# EAGLE board BoardSMU V2 PER STAMPA - Copia (EAGLE 9.6.2)
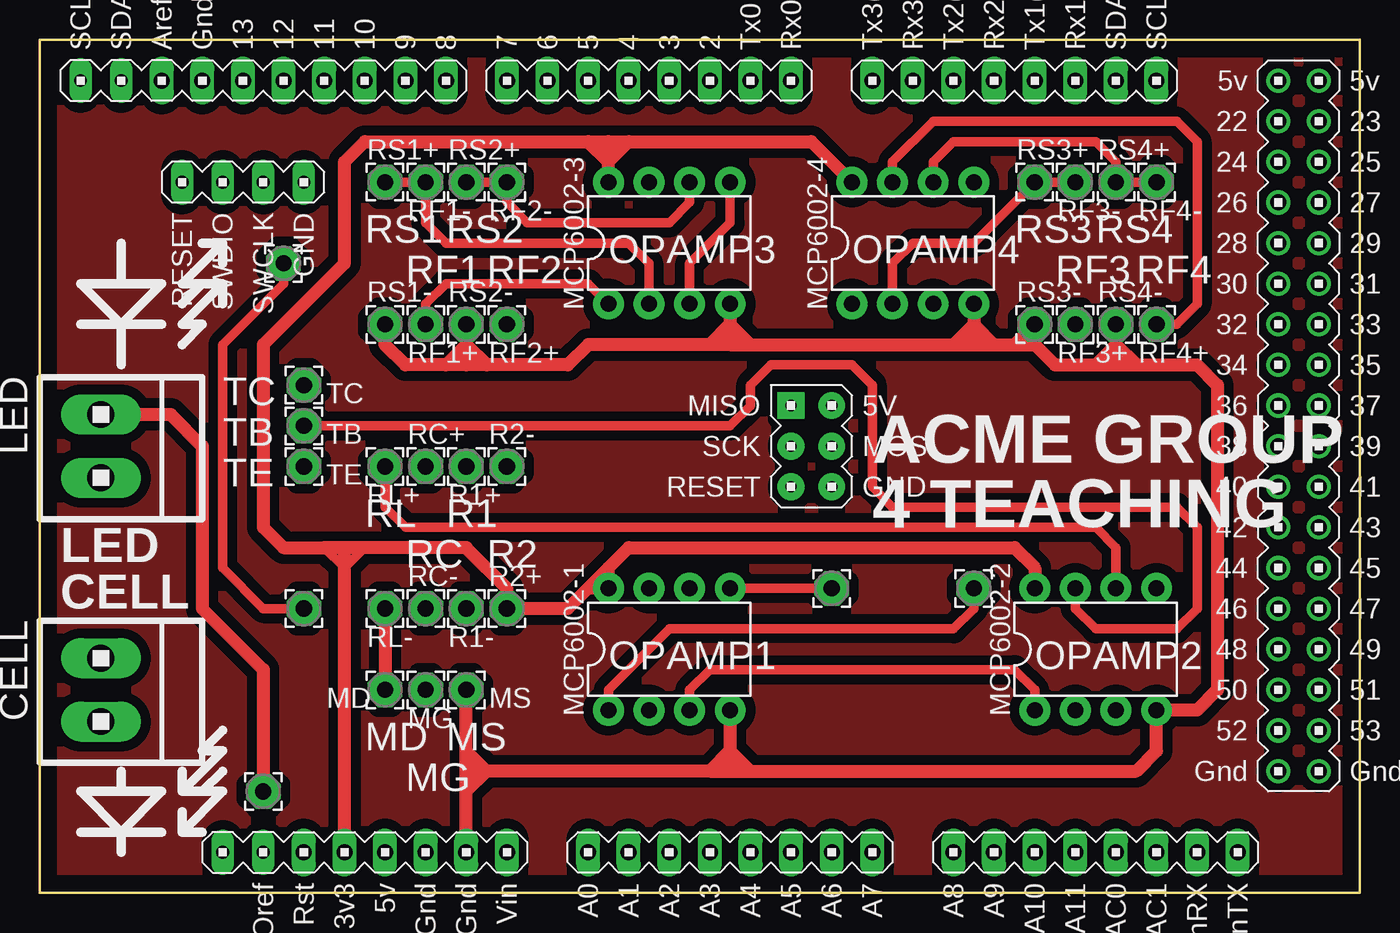
[diagram p0: board, top side]
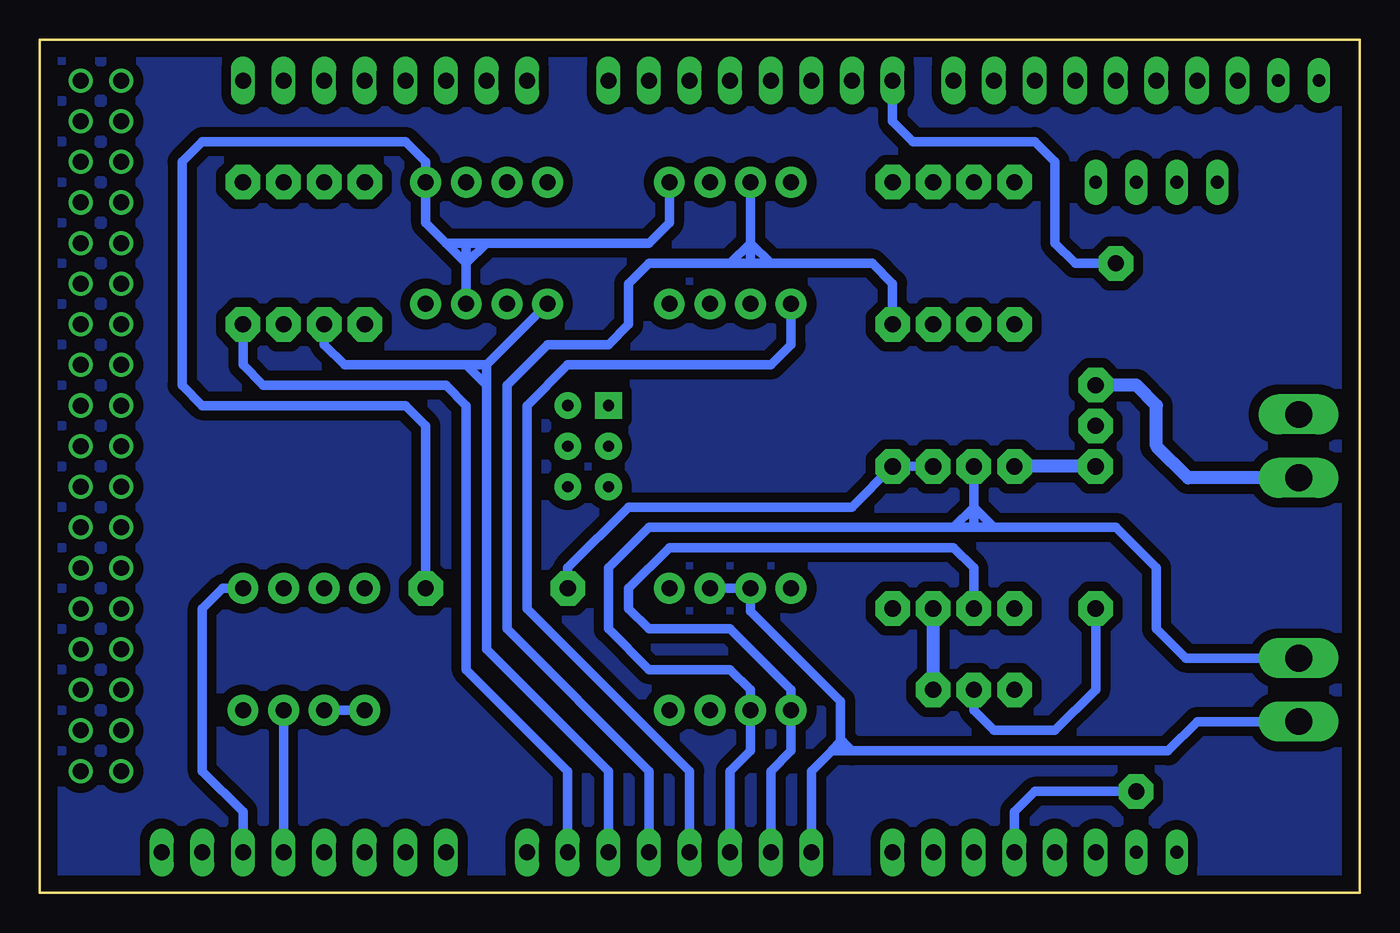
[diagram p1: board, bottom side, seen from below]

Size 82.55 x 53.34 mm. Coordinates in mm from the lower left corner, seen from the top.
Outline: 0,53.34 82.55,53.34 82.55,0 0,0 0,53.34
Copper layers (1*16): Top 0.035mm / dielectric 1.5mm / Bottom 0.035mm
Design rules "default": minimum track width 6mil, minimum drill 0.35mm, track to track 6mil, track to pad 6mil, pad to pad 6mil, via to via 6mil, smd to smd 6mil, copper to edge 40mil, drill to drill 6mil, minimum pad ring 10mil, minimum via ring 8mil, stop-mask expansion 4mil, vias tented up to drill 0mil, thermal gap 10mil

## Footprints (pad centres in the part's own frame; a part is rotated, then mirrored left to right if it is on the bottom)
1X2MTA = drill 1.676 long: 1 1.981,0; 2 -1.981,0
DUE(NORMAL) = drill 1 long: 2 -16.51,30.48; 3 -19.05,30.48; 3V3 -39.37,-17.78; 4 -21.59,30.48; 5 -24.13,30.48; 5V -36.83,-17.78; 6 -26.67,30.48; 7 -29.21,30.48; 8 -33.02,30.48; 9 -35.56,30.48; 10 -38.1,30.48; 11 -40.64,30.48; 12 -43.18,30.48; 13 -45.72,30.48; A0 -24.13,-17.78; A1 -21.59,-17.78; A2 -19.05,-17.78; A3 -16.51,-17.78; A4 -13.97,-17.78; A5 -11.43,-17.78; A6 -8.89,-17.78; A7 -6.35,-17.78; A8 -1.27,-17.78; A9 1.27,-17.78; A10 3.81,-17.78; A11 6.35,-17.78; AREF -50.8,30.48; AREF1 -50.8,30.48; CANRX 13.97,-17.78; CANTX 16.51,-17.78; DAC0 8.89,-17.78; DAC1 11.43,-17.78; GND1 -48.26,30.48; GND_1 -34.29,-17.78; GND_2 -31.75,-17.78; RESET -41.91,-17.78; RX0 -11.43,30.48; RX1 6.35,30.48; RX2 1.27,30.48; RX3 -3.81,30.48; SCL 11.43,30.48; SDA 8.89,30.48; TX0 -13.97,30.48; TX1 3.81,30.48; TX2 -1.27,30.48; TX3 -6.35,30.48; VIN -29.21,-17.78 | drill 1: 5V_A 19.05,30.48; 5V_B 21.59,30.48; 22 19.05,27.94; 23 21.59,27.94; 24 19.05,25.4; 25 21.59,25.4; 26 19.05,22.86; 27 21.59,22.86; 28 19.05,20.32; 29 21.59,20.32; 30 19.05,17.78; 31 21.59,17.78; 32 19.05,15.24; 33 21.59,15.24; 34 19.05,12.7; 35 21.59,12.7; 36 19.05,10.16; 37 21.59,10.16; 38 19.05,7.62; 39 21.59,7.62; 40 19.05,5.08; 41 21.59,5.08; 42 19.05,2.54; 43 21.59,2.54; 44 19.05,0; 45 21.59,0; 46 19.05,-2.54; 47 21.59,-2.54; 48 19.05,-5.08; 49 21.59,-5.08; 50 19.05,-7.62; 51 21.59,-7.62; 52 19.05,-10.16; 53 21.59,-10.16; GND_A 19.05,-12.7; GND_B 21.59,-12.7 | drill 0.7 pad 1.676: 5V_ICSP -8.89,5.08; GND_ICSP -8.89,10.16; MOSI_ICSP -8.89,7.62; RESET_ICSP -11.43,5.08; SCK_ICSP -11.43,7.62 | drill 0.8 pad 1.422 long: GND_DEBUG -41.91,24.13; IOREF -44.45,-17.78; NC -46.99,-17.78; RESET_DEBUG -49.53,24.13; SCL1 -55.88,30.48; SDA1 -53.34,30.48; SWCLK_DEBUG -44.45,24.13; SWDIO_DEBUG -46.99,24.13 | drill 0.7 pad 1.676 square: MISO_ICSP -11.43,10.16
DIL08 = drill 1 pad 1.93: 1 -3.81,-3.81; 2 -1.27,-3.81; 3 1.27,-3.81; 4 3.81,-3.81; 5 3.81,3.81; 6 1.27,3.81; 7 -1.27,3.81; 8 -3.81,3.81
2,15/1,0 = drill 1.016 pad 2.159 octagon: 1 0,0

## Placement (x,y rotation side)
CELL  [1X2MTA]  3.81,12.7 270 top
E$1  [DUE(NORMAL)]  58.42,20.32 0 top
LED  [1X2MTA]  3.81,27.94 270 top
MCP6002-1  [DIL08]  39.37,15.24 0 top
MCP6002-2  [DIL08]  66.04,15.24 0 top
MCP6002-3  [DIL08]  39.37,40.64 0 top
MCP6002-4  [DIL08]  54.61,40.64 0 top
MD  [2,15/1,0]  21.59,12.7 0 top
MG  [2,15/1,0]  24.13,12.7 0 top
MS  [2,15/1,0]  26.67,12.7 0 top
R1+  [2,15/1,0]  26.67,26.67 0 top
R1-  [2,15/1,0]  26.67,17.78 0 top
R2+  [2,15/1,0]  29.21,17.78 0 top
R2-  [2,15/1,0]  29.21,26.67 0 top
RC+  [2,15/1,0]  24.13,26.67 0 top
RC-  [2,15/1,0]  24.13,17.78 0 top
RF1+  [2,15/1,0]  24.13,35.56 0 top
RF1-  [2,15/1,0]  24.13,44.45 0 top
RF2+  [2,15/1,0]  29.21,35.56 0 top
RF2-  [2,15/1,0]  29.21,44.45 0 top
RF3+  [2,15/1,0]  64.77,35.56 0 top
RF3-  [2,15/1,0]  64.77,44.45 0 top
RF4+  [2,15/1,0]  69.85,35.56 0 top
RF4-  [2,15/1,0]  69.85,44.45 0 top
RL+  [2,15/1,0]  21.59,26.67 0 top
RL-  [2,15/1,0]  21.59,17.78 0 top
RS1+  [2,15/1,0]  21.59,44.45 0 top
RS1-  [2,15/1,0]  21.59,35.56 0 top
RS2+  [2,15/1,0]  26.67,44.45 0 top
RS2-  [2,15/1,0]  26.67,35.56 0 top
RS3+  [2,15/1,0]  62.23,44.45 0 top
RS3-  [2,15/1,0]  62.23,35.56 0 top
RS4+  [2,15/1,0]  67.31,44.45 0 top
RS4-  [2,15/1,0]  67.31,35.56 0 top
TB  [2,15/1,0]  16.51,29.21 0 top
TC  [2,15/1,0]  16.51,31.75 0 top
TE  [2,15/1,0]  16.51,26.67 0 top
V1  [2,15/1,0]  49.53,19.05 0 top  (not fitted)
V2  [2,15/1,0]  58.42,19.05 0 top  (not fitted)
V3  [2,15/1,0]  13.97,6.35 0 top  (not fitted)
V7  [2,15/1,0]  15.24,39.37 0 top  (not fitted)
V8  [2,15/1,0]  16.51,17.78 0 top  (not fitted)

## Library data of the parts
CELL LED = con-amp
E$1 = DUElib130425
MCP6002-1-MCP6002-4 = texas
MD MG MS R1+ R1- R2+ R2- RC+ RC- RF1+ RF1- RF2+ RF2- RF3+ RF3- RF4+ RF4- RL+ RL- RS1+ RS1- RS2+ RS2- RS3+ RS3- RS4+ RS4- TB TC TE V1-V3 V7 V8 = wirepad

## Nets
S$1: CELL.2 E$1.A2 MCP6002-1.2 RC+.1
S$2: E$1.A1 MCP6002-1.1 MCP6002-3.3 MCP6002-3.5 MCP6002-4.3 MCP6002-4.5 RC-.1 V2.1
S$3: E$1.DAC1 MCP6002-2.5
S$4: MCP6002-1.3 MCP6002-2.1 MCP6002-2.2
S$5: CELL.1 E$1.A0 MCP6002-1.6 MCP6002-1.7
S$6: MCP6002-2.7 TB.1
S$7: MCP6002-1.5 R1+.1 R2-.1 V1.1
S$8: E$1.A3 MCP6002-3.1 RF1+.1
S$9: LED.1 TC.1
S$10: E$1.GND_2 MCP6002-1.4 MCP6002-2.4 MCP6002-3.4 MCP6002-4.4 MS.1 R1-.1 RS1-.1 RS2-.1 RS3-.1 RS4-.1
S$11: MCP6002-2.6 RL+.1 TE.1
S$12: E$1.DAC0 MCP6002-2.3
S$13: MCP6002-3.2 RF1-.1 RS1+.1
S$14: MCP6002-3.6 RF2-.1 RS2+.1
S$15: MCP6002-4.2 RF3-.1 RS3+.1
S$16: MCP6002-4.6 RF4-.1 RS4+.1
S$17: E$1.5V LED.2 V3.1
S$18: E$1.3V3 MCP6002-1.8 MCP6002-2.8 MCP6002-3.8 MCP6002-4.8 R2+.1
S$19: E$1.A4 MCP6002-3.7 RF2+.1
S$20: E$1.A5 MCP6002-4.1 RF3+.1
S$21: E$1.A6 MCP6002-4.7 RF4+.1
S$24: MD.1 RL-.1
S$25: E$1.7 MG.1 V7.1 V8.1

## Tracks (layer width: path | path; a pad name or v marks a point on that pad's centre or on a via)
GNDBOTTOM
  pour Bottom (isolate 0.61): 0,53.34 82.55,53.34 82.55,0 0,0
GNDTOP
  pour Top (isolate 0.61): 0,53.34 82.55,53.34 82.55,0 0,0
S$1
  Bottom 0.61: E$1.A2 39.37,7.62 38.1,8.89 MCP6002-1.2 38.1,12.7 39.37,13.97 44.45,13.97 46.99,16.51 46.99,20.32 44.45,22.86 25.4,22.86 | CELL.2 10.87,14.68 12.7,16.51 12.7,20.32 15.24,22.86 22.86,22.86 | 25.4,22.86 24.13,22.86 | 24.13,22.86 22.86,22.86 | RC+.1 24.13,24.13 | 24.13,22.86 24.13,24.13 | 24.13,24.13 22.86,22.86 | 24.13,24.13 25.4,22.86
S$2
  Top 0.61: MCP6002-3.3 40.64,39.37 43.18,41.91 MCP6002-3.5 | V2.1 58.42,17.78 57.15,16.51 39.37,16.51 35.56,12.7 MCP6002-1.1
  Bottom 0.61: E$1.A1 36.83,7.62 35.56,8.89 MCP6002-1.1 35.56,12.7 39.37,16.51 44.45,16.51 45.72,17.78 45.72,19.05 43.18,21.59 25.4,21.59 24.13,20.32 RC-.1 | MCP6002-3.5 43.18,41.91 44.45,40.64 54.61,40.64 | 54.61,40.64 55.88,39.37 | MCP6002-4.3 55.88,39.37 | 55.88,39.37 57.15,40.64 | 57.15,40.64 58.42,41.91 MCP6002-4.5 58.42,45.72 59.69,46.99 72.39,46.99 73.66,45.72 73.66,31.75 72.39,30.48 59.69,30.48 58.42,29.21 58.42,26.67 V2.1 | 54.61,40.64 55.88,40.64 | 55.88,40.64 57.15,40.64 | 55.88,39.37 55.88,40.64
S$3
  Bottom 0.61: E$1.DAC1 69.85,5.08 72.39,7.62 72.39,17.78 71.12,19.05 MCP6002-2.5
S$4
  Top 0.61: MCP6002-1.3 40.64,12.7 41.91,13.97 60.96,13.97 62.23,12.7 MCP6002-2.1
  Bottom 0.61: MCP6002-2.2 MCP6002-2.1
S$5
  Bottom 0.61: E$1.A0 34.29,7.62 33.02,8.89 | MCP6002-1.6 MCP6002-1.7 38.1,17.63 32.46,11.99 32.46,9.45 | 32.46,9.45 33.02,8.89 | CELL.1 10.16,10.72 11.99,8.89 31.75,8.89 | 31.75,8.89 33.02,8.89 | 31.75,8.89 32.31,9.45 32.46,9.45
S$6
  Top 0.61: TB.1 43.18,29.21 44.45,30.48 44.45,31.75 45.72,33.02 50.8,33.02 52.07,31.75 52.07,25.4 53.34,24.13 71.12,24.13 72.39,22.86 72.39,17.78 71.12,16.51 66.04,16.51 64.77,17.78 MCP6002-2.7
S$7
  Top 0.61: MCP6002-1.5 V1.1
  Bottom 0.61: R1+.1 R2-.1 31.75,24.13 45.72,24.13 49.53,20.32 V1.1
S$8
  Top 0.61: RF1+.1 24.13,36.83 25.4,38.1 34.29,38.1 MCP6002-3.1
  Bottom 0.61: E$1.A3 41.91,7.62 52.07,17.78 52.07,30.48 49.53,33.02 36.83,33.02 35.56,34.29 MCP6002-3.1
S$9
  Bottom 0.813: LED.1 10.72,25.96 12.7,27.94 12.7,30.48 13.97,31.75 TC.1
S$10
  Top 0.813: E$1.GND_2 26.67,6.35 | 26.67,6.35 26.67,7.62 | 26.67,7.62 26.67,8.89 | MCP6002-1.4 43.18,8.89 | 43.18,8.89 41.91,7.62 | 41.91,7.62 27.94,7.62 | 26.67,7.62 27.94,7.62 | 26.67,6.35 27.94,7.62 | 27.94,7.62 26.67,8.89 | 41.91,7.62 43.18,7.62 | 43.18,7.62 44.45,7.62 | 44.45,7.62 68.58,7.62 69.85,8.89 MCP6002-2.4 72.39,11.43 73.66,12.7 73.66,31.75 72.39,33.02 68.58,33.02 | 43.18,8.89 43.18,7.62 | 43.18,8.89 44.45,7.62 | MCP6002-3.4 43.18,35.56 | 43.18,35.56 43.18,34.29 | 43.18,34.29 44.45,34.29 | 44.45,34.29 57.15,34.29 | 57.15,34.29 58.42,34.29 | 58.42,34.29 58.42,35.56 | MCP6002-4.4 58.42,35.56 | 58.42,34.29 59.69,34.29 | 59.69,34.29 60.96,34.29 | 60.96,34.29 RS3-.1 62.23,34.29 | 62.23,34.29 63.5,33.02 66.04,33.02 | 66.04,33.02 67.31,34.29 | 60.96,34.29 62.23,34.29 | 67.31,34.29 RS4-.1 67.31,33.02 | 67.31,34.29 68.58,33.02 | 66.04,33.02 67.31,33.02 | 67.31,33.02 68.58,33.02 | 27.94,33.02 33.02,33.02 34.29,34.29 41.91,34.29 | 26.67,34.29 27.94,33.02 | 26.67,34.29 RS2-.1 26.67,33.02 | 43.18,34.29 41.91,34.29 | 27.94,33.02 26.67,33.02 | 26.67,33.02 25.4,33.02 | 25.4,33.02 22.86,33.02 21.59,34.29 RS1-.1 | 26.67,34.29 25.4,33.02 | 43.18,35.56 41.91,34.29 | 43.18,35.56 44.45,34.29 | 58.42,35.56 57.15,34.29 | 58.42,35.56 59.69,34.29 | 26.67,8.89 MS.1
  Bottom 0.813: MS.1 R1-.1
S$11
  Top 0.61: MCP6002-2.6 67.31,21.59 66.04,22.86 22.86,22.86 21.59,24.13 RL+.1
  Bottom 0.813: TE.1 RL+.1
S$12
  Bottom 0.61: E$1.DAC0 MCP6002-2.3
S$13
  Top 0.61: RS1+.1 RF1-.1 24.13,41.91 25.4,40.64 36.83,40.64 38.1,39.37 MCP6002-3.2
S$14
  Top 0.61: RS2+.1 RF2-.1 29.21,43.18 30.48,41.91 39.37,41.91 40.64,43.18 MCP6002-3.6
S$15
  Top 0.61: RF3-.1 RS3+.1 58.42,40.64 54.61,40.64 53.34,39.37 MCP6002-4.2
S$16
  Top 0.61: RF4-.1 RS4+.1 67.31,45.72 66.04,46.99 57.15,46.99 55.88,45.72 MCP6002-4.6
S$17
  Top 0.813: LED.2 8.18,29.92 10.16,27.94 10.16,17.78 13.97,13.97 V3.1
  Bottom 0.61: V3.1 20.32,6.35 21.59,5.08 E$1.5V
S$18
  Top 0.61: 17.78,21.59 19.05,20.32 20.32,21.59
  Top 0.813: 34.29,19.05 MCP6002-1.8 35.56,20.32 | 34.29,19.05 33.02,17.78 R2+.1 29.21,19.05 26.67,21.59 20.32,21.59 19.05,21.59 | 19.05,21.59 17.78,21.59 15.24,21.59 13.97,22.86 13.97,34.29 19.05,39.37 19.05,45.72 20.32,46.99 34.29,46.99 | E$1.3V3 19.05,20.32 19.05,21.59 | 35.56,20.32 36.83,21.59 60.96,21.59 62.23,20.32 MCP6002-2.8 | 34.29,19.05 35.56,20.32 | MCP6002-4.8 48.26,46.99 36.83,46.99 | MCP6002-3.8 35.56,45.72 | 35.56,45.72 36.83,46.99 | 35.56,46.99 36.83,46.99 | 35.56,45.72 35.56,46.99 | 34.29,46.99 35.56,46.99 | 35.56,45.72 34.29,46.99
S$19
  Bottom 0.61: RF2+.1 29.21,38.1 30.48,39.37 36.83,39.37 | 36.83,39.37 38.1,40.64 | MCP6002-3.7 38.1,40.64 | 38.1,40.64 39.37,39.37 | E$1.A4 44.45,7.62 53.34,16.51 53.34,31.75 50.8,34.29 46.99,34.29 45.72,35.56 45.72,38.1 44.45,39.37 39.37,39.37 | 36.83,39.37 38.1,39.37 | 38.1,39.37 39.37,39.37 | 38.1,40.64 38.1,39.37
S$20
  Bottom 0.61: MCP6002-4.1 54.61,33.02 | E$1.A5 46.99,7.62 54.61,15.24 54.61,31.75 | RF3+.1 64.77,34.29 63.5,33.02 55.88,33.02 | 55.88,33.02 54.61,33.02 | 54.61,31.75 55.88,33.02 | 54.61,33.02 54.61,31.75
S$21
  Top 0.61: MCP6002-4.7 53.34,45.72 55.88,48.26 71.12,48.26 72.39,46.99 72.39,36.83 71.12,35.56 RF4+.1
  Bottom 0.61: RF4+.1 69.85,33.02 68.58,31.75 57.15,31.75 55.88,30.48 55.88,13.97 49.53,7.62 E$1.A6
S$24
  Top 0.813: RL-.1 MD.1
S$25
  Top 0.61: V7.1 15.24,38.1 11.43,34.29 11.43,20.32 13.97,17.78 V8.1
  Bottom 0.61: E$1.7 29.21,48.26 27.94,46.99 20.32,46.99 19.05,45.72 19.05,40.64 17.78,39.37 V7.1 | V8.1 16.51,12.7 19.05,10.16 22.86,10.16 24.13,11.43 MG.1

## Text on the board
tNames: RS1 | RS2 | RS3 | RS4 | OPAMP3 | OPAMP4 | RF1 | RF2 | RF3 | RF4 | TC | TB | TE | RL | R1 | ACME GROUP / 4 TEACHING | RC | R2 | LED / CELL | OPAMP1 | OPAMP2 | MD | MS | MG